# Altium PCB PCB1.PcbDoc
Units mm, origin at the board's own origin, x right, y up, seen from the top; angles counter-clockwise.
Board outline 20.32 x 24.13 mm, 2 copper layers (Top Layer, Bottom Layer); 3 components, 16 nets, 32 pads, 0 vias.
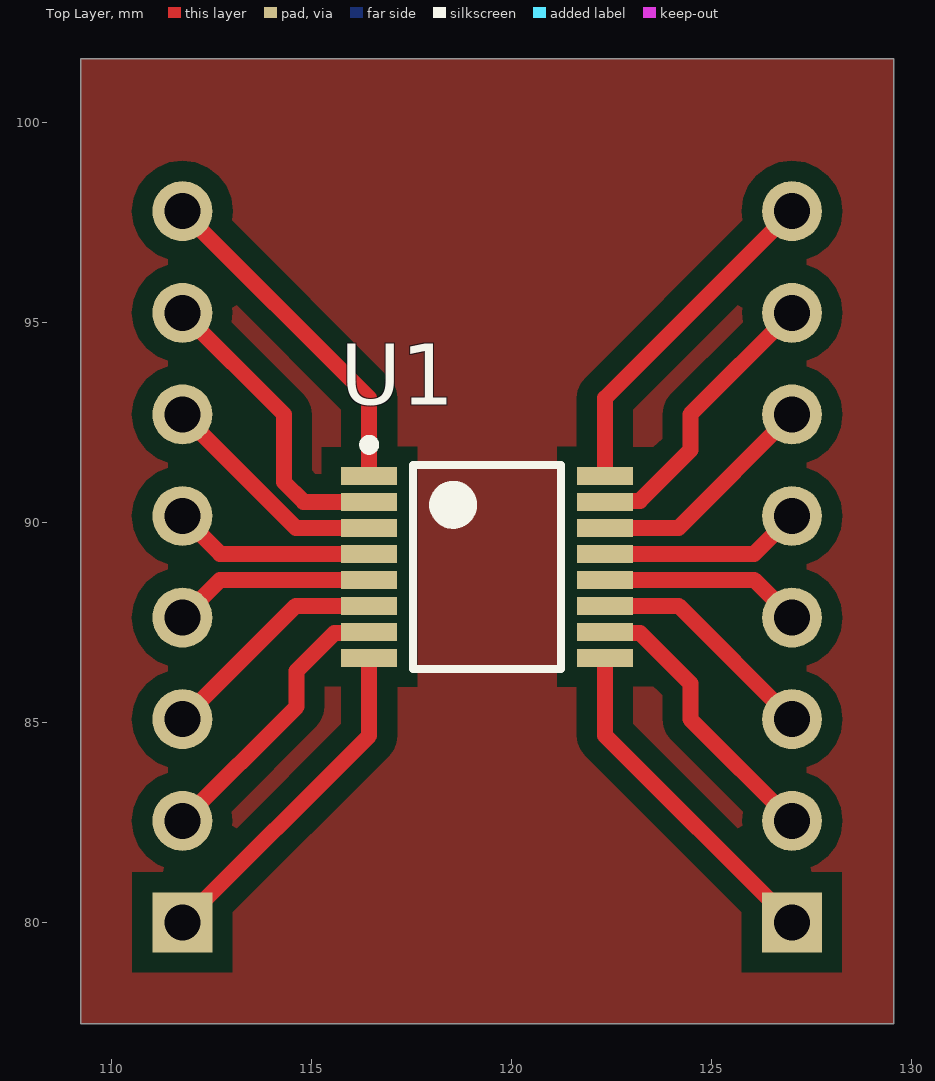
[diagram p0: Top Layer view]
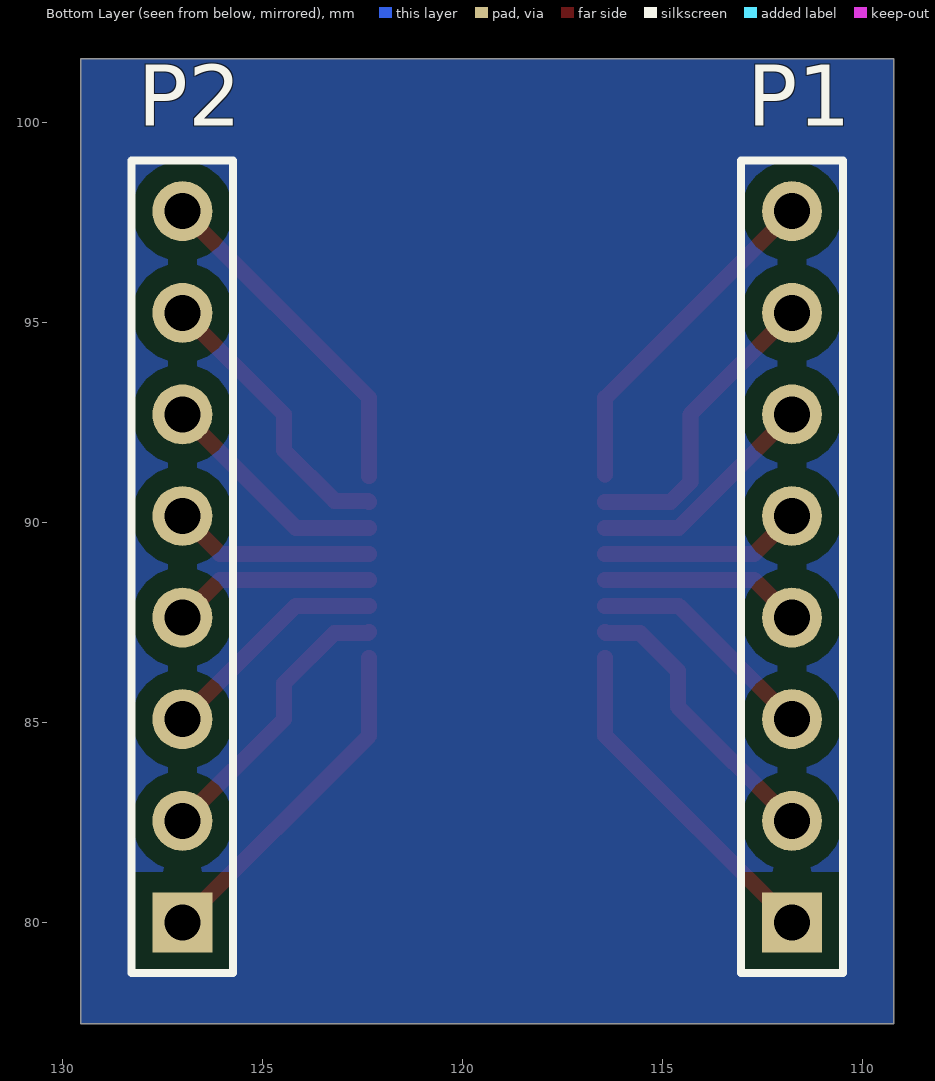
[diagram p1: Bottom Layer view, seen from below]

## Layer stack, top to bottom
Top Solder: solder mask 0.0102, Solder Resist, Dk 3.5
Top Layer: signal copper 0.0356
Dielectric 1: dielectric 0.32, FR-4, Dk 4.8
Bottom Layer: signal copper 0.0356
Bottom Solder: solder mask 0.0102, Solder Resist, Dk 3.5

## Board outline
109.22,101.6 129.54,101.6 129.54,77.47 109.22,77.47

## Design rules (kind name [scope] priority, off if disabled: settings)
Clearance [All] p1: gap=0.2 except(0.5: Poly-Poly SMDPad-Poly Track-Poly Via-Poly Arc-Poly Fill-Poly THPad-Poly)
PlaneClearance [All] p1: clearance=5
PolygonConnect [All] p1: connectstyle=Relief reliefconductorwidth=0.254 reliefentries=4 polygonreliefangle="90 Angle" airgapwidth=0.254
RoutingVias [All] p1: holewidth=0.711 width=1.27 viastyle="Through Hole" minholewidth=0.711 minwidth=1.27 maxholewidth=0.711 maxwidth=1.27
SolderMaskExpansion [All] p1: expansion=0.102
UnpouredPolygon [All] p1: allowunpoured=FALSE
Width [All] p1: maxlimit=1 minlimit=0.3 preferedwidth=0.4
28 further rules are at their usual default settings.

## Components (designator, comment, footprint, x,y, rotation, side; value= is the part's Value field where it differs from the comment)
P1 "Header 8" HDR1X8 111.76,80.01 r90 bottom
P2 "Header 8" HDR1X8 127,80.01 r90 bottom
U1 "SN65LVDS049" SOP127P600-8N 119.38,88.9 r0 top

## Footprints (in the part's own frame and the unit in brackets; to place one, negate y for a bottom-side part, rotate by r counter-clockwise, add the part's x,y. Pads: shape width x height; smd on the part's side, far side on the other; paste and mask are expansions set on the pad)
HDR1X8 [mm] "Connector; Header; 8 Position"
  rect 1.5x1.5 hole 0.9: 1(0,0)
  round 1.5 hole 0.9: 2(2.54,0) 3(5.08,0) 4(7.62,0) 5(10.16,0) 6(12.7,0) 7(15.24,0) 8(17.78,0)
  silkscreen extent -1.27,-1.27 19.05,1.27
SOP127P600-8N [mm]
  rect 1.4x0.45 smd: 1(-2.95,2.275) 2(-2.95,1.625) 3(-2.95,0.975) 4(-2.95,0.325) 5(-2.95,-0.325) 6(-2.95,-0.975) 7(-2.95,-1.625) 8(-2.95,-2.275) 9(2.95,-2.275) 10(2.95,-1.625) 11(2.95,-0.975) 12(2.95,-0.325) 13(2.95,0.325) 14(2.95,0.975) 15(2.95,1.625) 16(2.95,2.275)
  silkscreen extent -3.07,-2.55 1.85,3.17, body extent -2.25,-2.55 2.25,2.55, height 1.2

## Part data
P1 P2: "Header, 8-Pin"

## Nets (pads, with @x,y where several pads share a name; then routed paths per layer and width w, separated by ;. In a path a pad name is that pad's centre, name@x,y a point inside that pad or via, vN(x,y) a via of type N, cw(c..) or ccw(c..) an arc to the next point about the centre after c; other vN are vias at no path point)
NetP1_1: P1.1 U1.8 | length 8.5
  Top Layer w0.4: P1.1 116.43,84.68 U1.8
NetP1_2: P1.2 U1.7 | length 7.2
  Top Layer w0.4: P1.2 114.613,85.403 114.613,86.299 115.564,87.25 116.405,87.25 U1.7
NetP1_3: P1.3 U1.6 | length 5.8
  Top Layer w0.4: P1.3 114.595,87.925 U1.6
NetP1_4: P1.4 U1.5 | length 5.4
  Top Layer w0.4: P1.4@112.089,87.63 P1.4 112.705,88.575 U1.5
NetP1_5: P1.5 U1.4 | length 5.1
  Top Layer w0.4: P1.5 112.705,89.225 U1.4
NetP1_6: P1.6 U1.3 | length 5.8
  Top Layer w0.4: P1.6 114.595,89.875 U1.3
NetP1_7: P1.7 U1.2 | length 7.6
  Top Layer w0.4: P1.7 114.3,92.71 114.3,91.019 114.794,90.525 U1.2
NetP1_8: P1.8 U1.1 | length 8.5
  Top Layer w0.4: P1.8 116.43,93.12 U1.1@116.43,91.204
NetP2_1: P2.1 U1.9 | length 8.5
  Top Layer w0.4: U1.9 122.33,84.68 P2.1
NetP2_2: P2.2 U1.10 | length 7.2
  Top Layer w0.4: U1.10 122.355,87.25 123.196,87.25 124.46,85.986 124.46,85.09 P2.2
NetP2_3: P2.3 U1.11 | length 5.8
  Top Layer w0.4: U1.11 124.165,87.925 P2.3
NetP2_4: P2.4 U1.12 | length 5.1
  Top Layer w0.4: U1.12 126.055,88.575 P2.4
NetP2_5: P2.5 U1.13 | length 5.1
  Top Layer w0.4: U1.13 126.055,89.225 P2.5
NetP2_6: P2.6 U1.14 | length 5.8
  Top Layer w0.4: U1.14 124.165,89.875 P2.6
NetP2_7: P2.7 U1.15 | length 7.2
  Top Layer w0.4: U1.15 122.355,90.55 123.196,90.55 124.46,91.814 124.46,92.71 P2.7
NetP2_8: P2.8 U1.16 | length 8.5
  Top Layer w0.4: U1.16 122.33,93.12 P2.8

## Polygon pours and split planes (outlines as drawn)
no net on Top Layer "Top Layer-No Net" (solid, pour order 2): 109.22,101.6 129.54,101.6 129.54,77.47 109.22,77.47
no net on Bottom Layer "Top Layer-No Net" (solid, pour order 4): 109.22,101.6 129.54,101.6 129.54,77.47 109.22,77.47

## Silkscreen, mask and mechanical layers (free items; w line width, h text height)
Mechanical 1:
  lines w0.254: 109.22,77.47 129.54,77.47 129.54,101.6 109.22,101.6 109.22,77.47 ; 109.22,77.47 109.22,77.47